# Altium PCB PCB1.PcbDoc
Units mil, origin at the board's own origin, x right, y up, seen from the top; angles counter-clockwise.
Board outline 2250 x 1350 mil, 2 copper layers (Top Layer, Bottom Layer); 12 components, 8 nets, 24 pads, 2 vias.
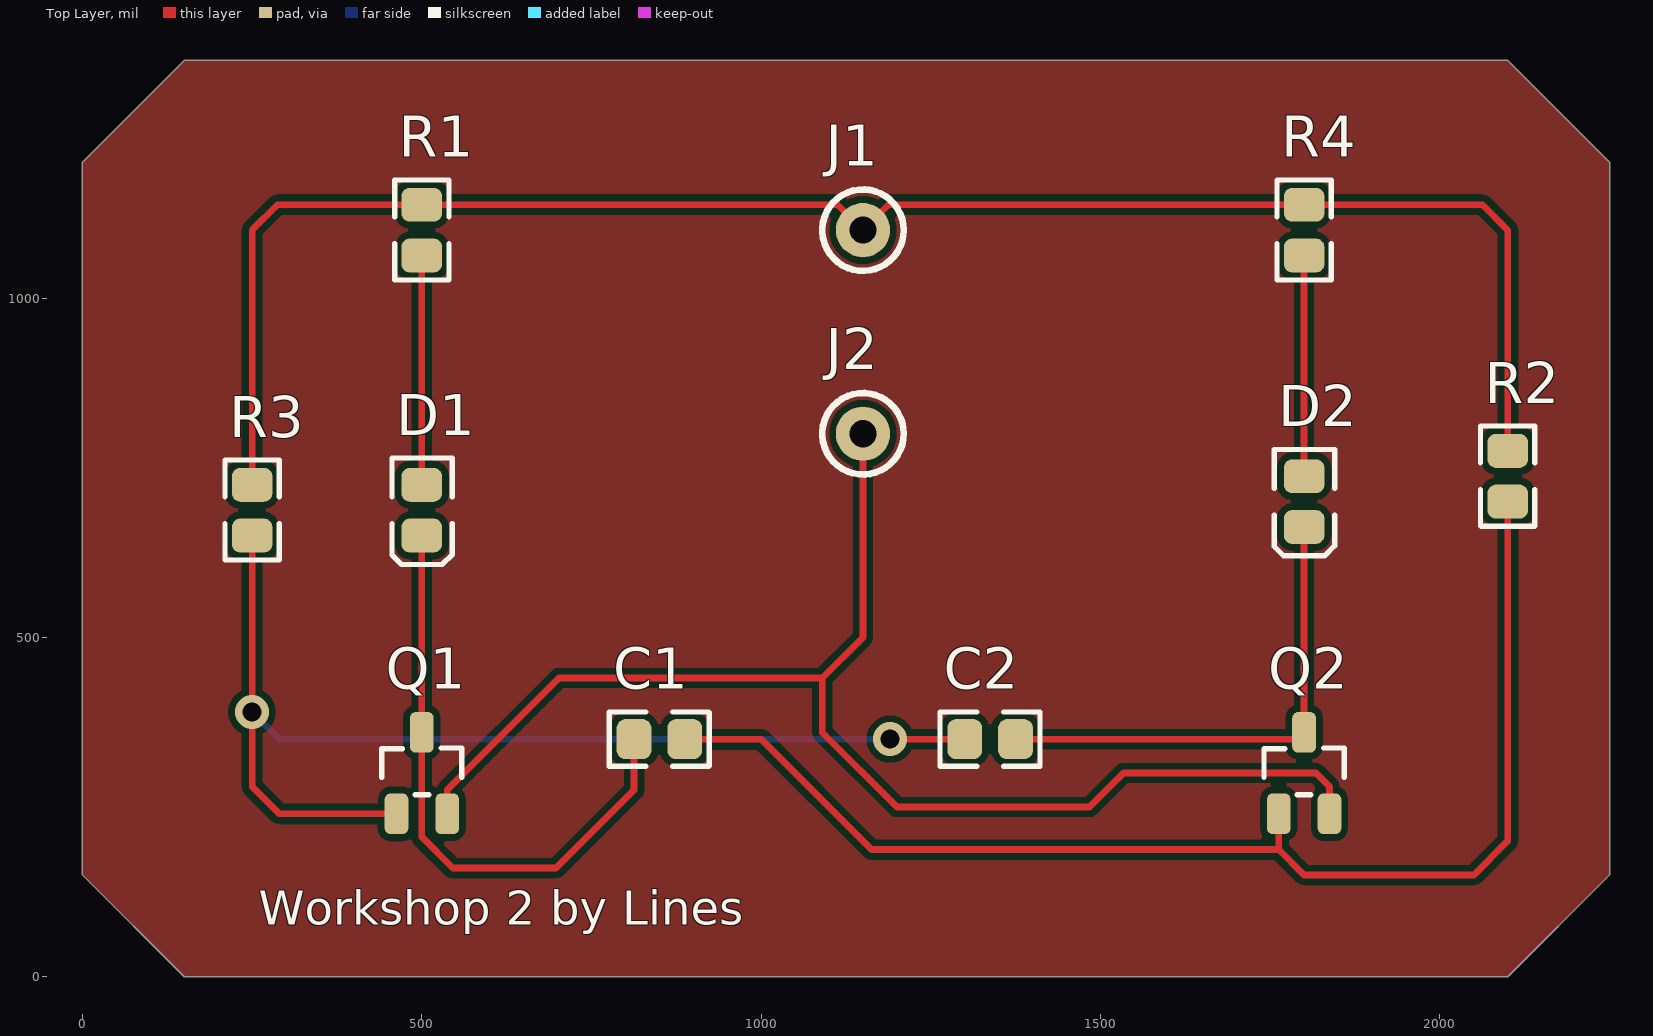
[diagram p0: Top Layer view]
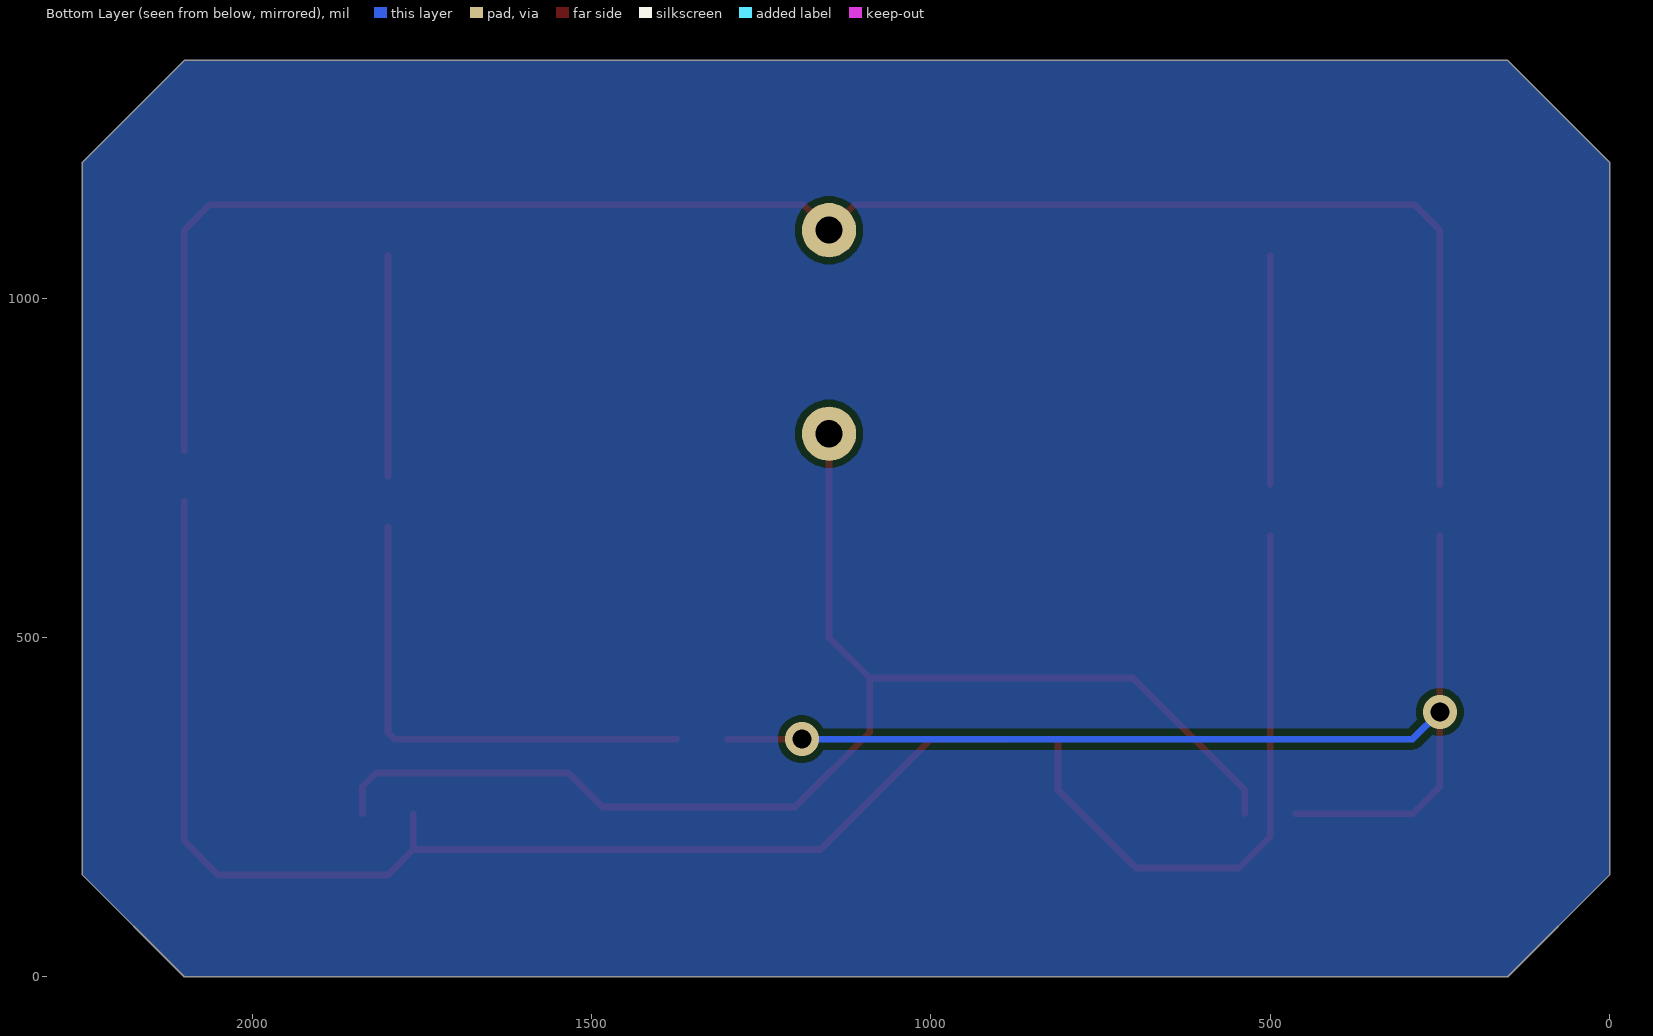
[diagram p1: Bottom Layer view, seen from below]
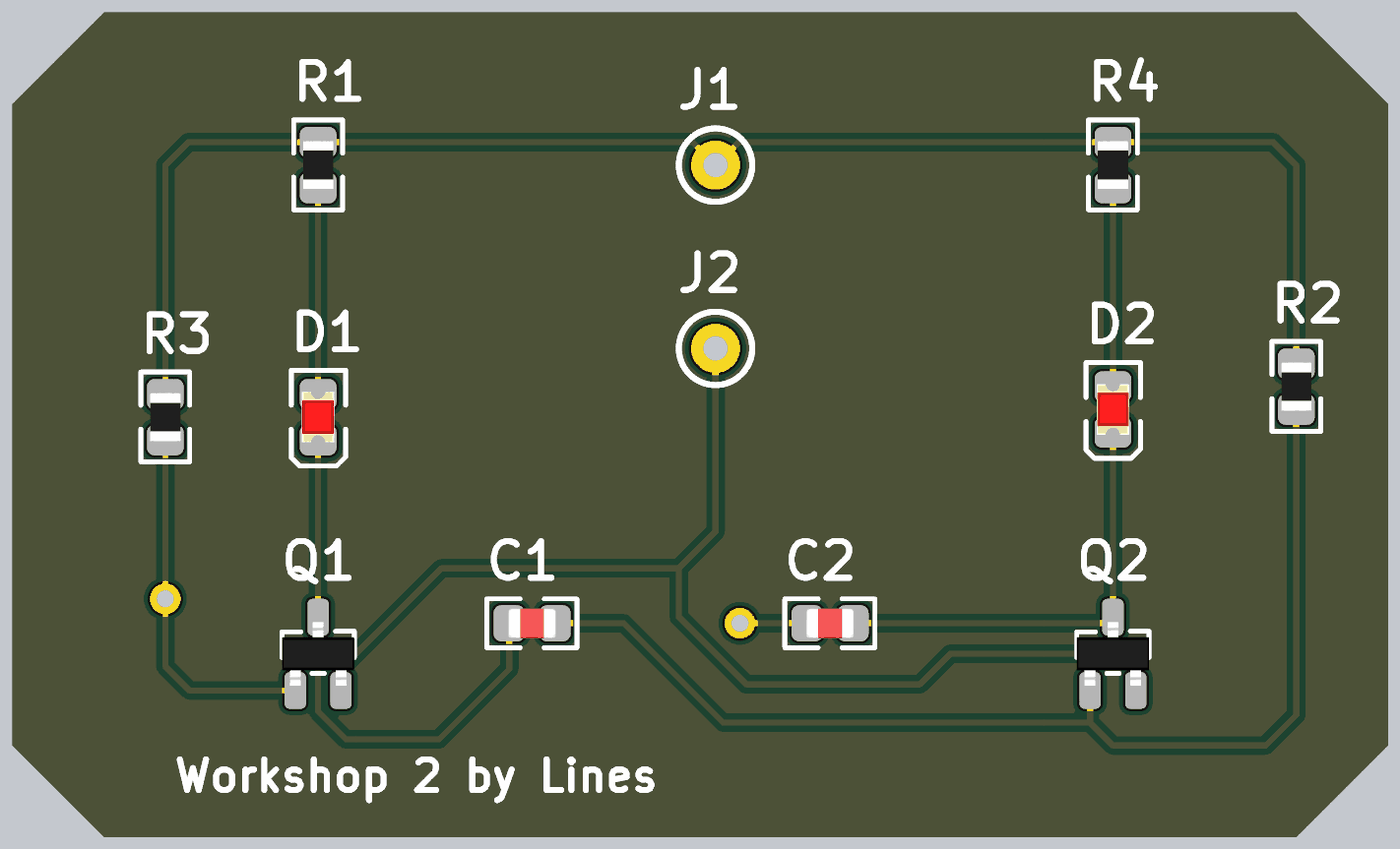
[diagram p2: 3D render of the assembled board from above, using the file's embedded part models]

## Layer stack, top to bottom
Top Solder: solder mask 0.4, Solder Resist, Dk 3.5
Top Layer: signal copper 1.4
Dielectric 1: dielectric 12.6, FR-4, Dk 4.8
Bottom Layer: signal copper 1.4
Bottom Solder: solder mask 0.4, Solder Resist, Dk 3.5

## Board outline
150,0 0,150 0,1200 150,1350 2100,1350 2250,1200 2250,150 2100,0

## Design rules (kind name [scope] priority, off if disabled: settings)
Clearance [All] p1: gap=10 ignorepadtopadclearanceinfootprint=FALSE except(0: Arc-Hole Track-Hole SMDPad-Hole THPad-Hole Via-Hole Fill-Hole Poly-Hole Region-Hole Text-Hole)
PolygonConnect [All] p1: connectstyle=Relief reliefconductorwidth=10 reliefentries=4 polygonreliefangle="90 Angle" airgapwidth=10
RoutingVias [All] p1: holewidth=28 width=50 viastyle="Through Hole" minholewidth=28 minwidth=50 maxholewidth=28 maxwidth=50
SolderMaskExpansion [All] p1: expansion=4 istentingtop=FALSE
Width [All] p1: maxlimit=10 minlimit=10 preferedwidth=10
30 further rules are at their usual default settings.

## Components (designator, comment, footprint, x,y, rotation, side; value= is the part's Value field where it differs from the comment)
C1 "10μF" 0805_CAP 850,350 r180 top
C2 "10μF" 0805_CAP 1337.4,350 r180 top
D1 "Low" 0805_DIODE 500,687.4 r90 top
D2 "High" 0805_DIODE 1800,700 r90 top value=Power
J1 "VCC" PIN_1MM 1150,1100 r0 top value="Test Point"
J2 "GND" PIN_1MM 1150,800 r0 top value="Test Point"
Q1 "MMBT3904" SOT23-3 500,300 r90 top
Q2 "MMBT3904" SOT23-3 1800,300 r90 top
R1 "1kΩ" 0805_RES 500,1100 r90 top
R2 "75kΩ" 0805_RES 2100,737.4 r90 top
R3 "75kΩ" 0805_RES 250,687.4 r90 top
R4 "1kΩ" 0805_RES 1800,1100 r90 top

## Footprints (in the part's own frame and the unit in brackets; to place one, negate y for a bottom-side part, rotate by r counter-clockwise, add the part's x,y. Pads: shape width x height; smd on the part's side, far side on the other; paste and mask are expansions set on the pad)
0805_CAP [mm] "0805 Capacitor"
  rrect50% 1.3x1.5 smd: 1(-0.95,0) 2(0.95,0)
  silkscreen extent -1.87,-1.02 1.88,1.02, body extent -1,-0.62 1,0.63, height 0.78
0805_DIODE [mil] "0805 LED"
  rrect50% 50x60 smd: A(37.4,0) K(-37.4,0)
  silkscreen extent -80,-45 77,44, body extent -41,-27 41,27, height 35
0805_RES [mil] "0805 Resistor"
  rrect50% 50x60 smd: 1(-37.4,0) 2(37.4,0)
  silkscreen extent -74,-40 74,40, body extent -39,-25 39,24, height 20
PIN_1MM [mil] "Single Pin"
  round 80 hole 40: 1(0,0)
  silkscreen extent -60,-60 60,60
SOT23-3 [mil] "SOT23-3"
  rrect50% 60x35 smd: 1(-60,37.4) 2(-60,-37.4) 3(60,0)
  silkscreen extent -32,-59 37,59, body extent -52,-59 52,59, height 43

## Part data
C1 C2: library part C, "Generic non-polarised capacitor.", Revision="July-2002: Re-released for DXP Platform."
D1: library part LED, "Generic LED.", Color=Red, Revision="July-2002: Re-released for DXP Platform."
D2: library part LED, "Generic LED.", Color=Green, Revision="July-2002: Re-released for DXP Platform."
J1 J2: library part TEST_POINT, "Generic wire-to-board point or test point."
Q1 Q2: library part NPN_BJT, "Generic NPN bipolar transistor."
R1 R2 R3 R4: library part R, "Generic resistor."

## Via types
v1: diameter 50, hole 28, Top Layer to Bottom Layer, 2 vias

## Nets (pads, with @x,y where several pads share a name; then routed paths per layer and width w, separated by ;. In a path a pad name is that pad's centre, name@x,y a point inside that pad or via, vN(x,y) a via of type N, cw(c..) or ccw(c..) an arc to the next point about the centre after c; other vN are vias at no path point)
GND: J2.1 Q1.2 Q2.2 | length 1983
  Top Layer w10: Q1.2 537.4,275.4 702,440 1090,440 ; J2.1 1150,500 1090,440 ; Q2.2 1837.4,280 1817.4,300 1533.7,300 1483.7,250 1200,250 1090,360 1090,440
NetC1_2: C1.2 D1.K Q1.3 | length 898.5
  Top Layer w10: D1.K Q1.3 500,205.6 545.6,160 697.6,160 812.6,275 C1.2
NetC2_1: C2.1 D2.K Q2.3 | length 731.9
  Top Layer w10: C2.1 1790,350 Q2.3 D2.K
NetD1_A: D1.A R1.1 | length 337.8
  Top Layer w10: D1.A R1.1
NetD2_A: D2.A R4.1 | length 325.2
  Top Layer w10: D2.A R4.1
Q1_BASE: C2.2 Q1.1 R3.1 | length 1665.7
  Top Layer w10: R3.1 v1(250,390) 250,280 290,240 Q1.1 ; v1(1190,350) C2.2
  Bottom Layer w10: v1(250,390) 290,350 v1(1190,350)
Q2_BASE: C1.1 Q2.1 R2.1 | length 1868.7
  Top Layer w10: C1.1 1000,350 1162.6,187.4 1762.6,187.4 ; Q2.1 1762.6,187.4 ; R2.1 2100,200 2050,150 1800,150 1762.6,187.4
VCC: J1.1 R1.2 R2.2 R3.2 R4.2 | length 2612.4
  Top Layer w10: R3.2 250,1100 287.4,1137.4 R1.2 1112.6,1137.4 J1.1 1187.4,1137.4 R4.2 2062.6,1137.4 2100,1100 R2.2

## Polygon pours and split planes (outlines as drawn)
no net on Bottom Layer "NONET_L02_P001" (solid, pour order 1): 150,1350 0,1200 0,150 150,0 2100,0 2250,150 2250,1200 2100,1350
no net on Top Layer "NONET_L01_P004" (solid, pour order 4): 150,1350 0,1200 0,150 150,0 2100,0 2250,150 2250,1200 2100,1350

## Silkscreen, mask and mechanical layers (free items; w line width, h text height)
Top Overlay:
  text "Workshop 2 by Lines" at 260,76.66 h50
Mechanical 13:
  the board outline again, w10